# EAGLE board dynalo_v_dual (EAGLE 7.4.0)
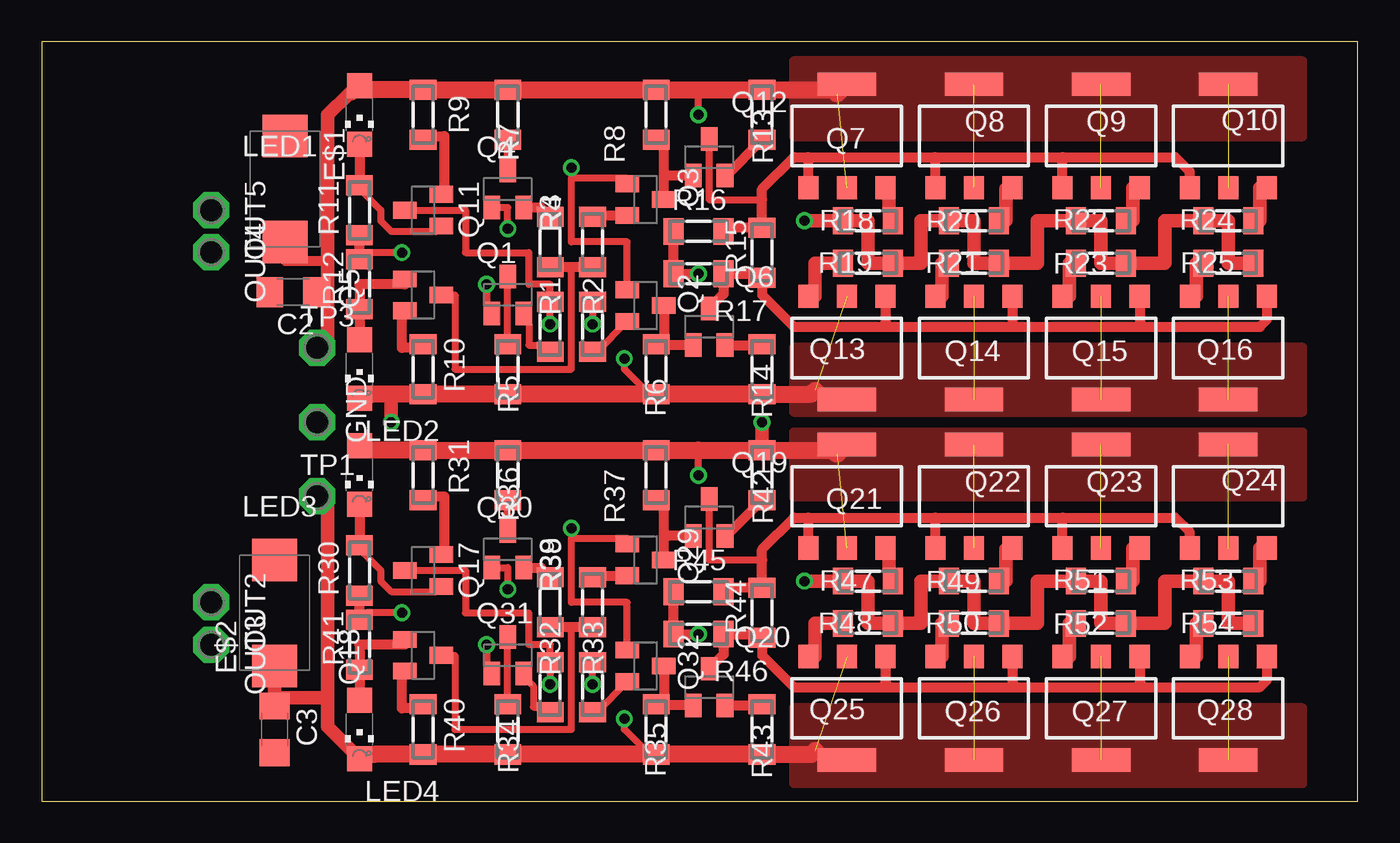
[diagram p0: board, top side]
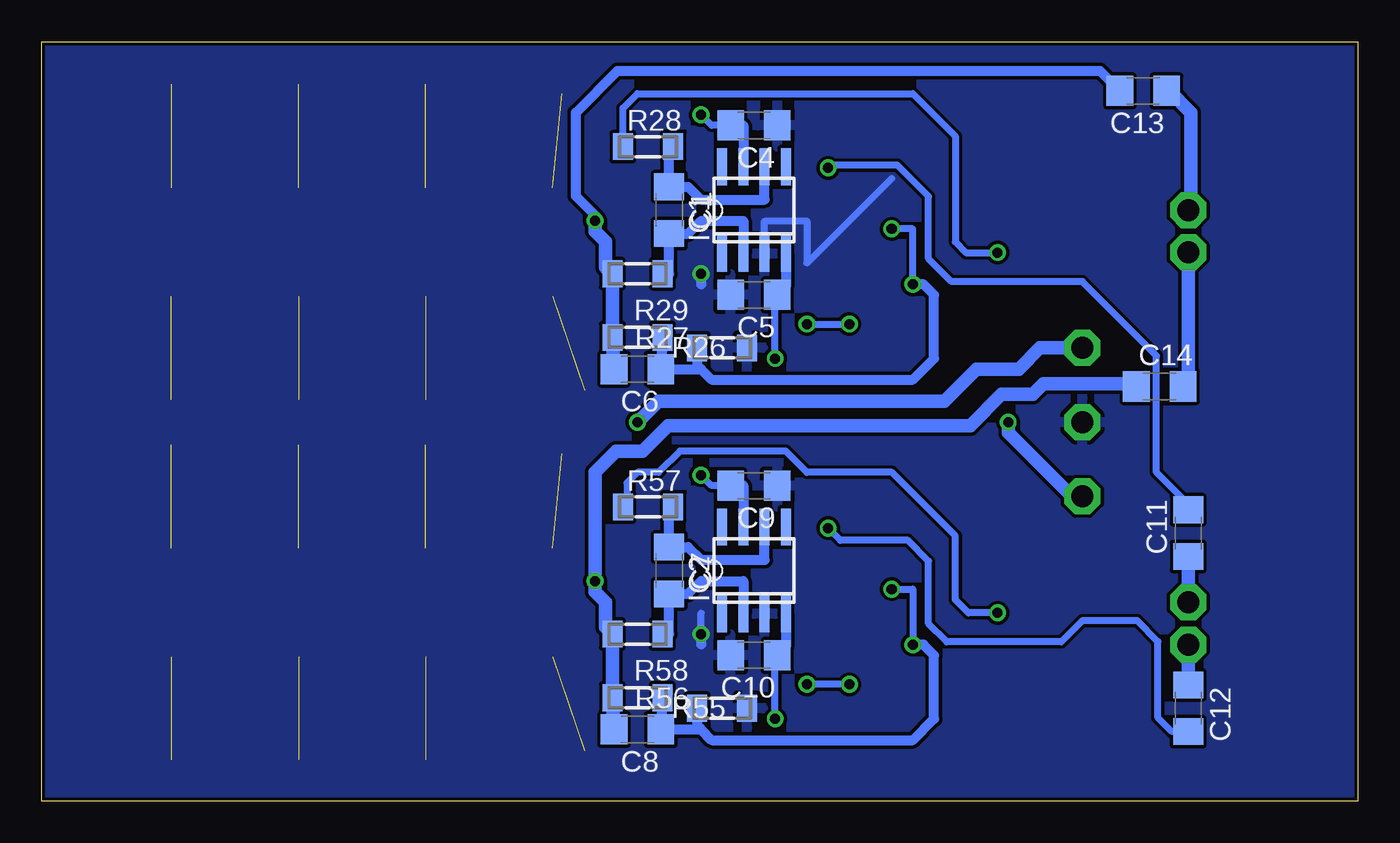
[diagram p1: board, bottom side, seen from below]

Size 78.89 x 45.5 mm. Coordinates in mm from the lower left corner, seen from the top.
Outline: 0,0 78.89,0 78.89,45.5 0,45.5 0,0
Copper layers (1*16): Top 0.035mm / dielectric 1.5mm / Bottom 0.035mm
Design rules "default *": minimum track width 10mil, minimum drill 0.3mm, track to track 8mil, track to pad 8mil, pad to pad 8mil, via to via 8mil, smd to smd 8mil, copper to edge 8mil, drill to drill 8mil, minimum pad ring 10mil, minimum via ring 8mil, stop-mask expansion 4mil, vias tented up to drill 0mil, thermal gap 10mil

## Footprints (pad centres in the part's own frame; a part is rotated, then mirrored left to right if it is on the bottom)
C1206 = smd 1.6 x 1.8: 1 -1.4,0; 2 1.4,0
D/7343-31R = smd 2.55 x 2.7: + 3.175,0; - -3.175,0
P1-13 = drill 1.321 pad 2.159 octagon: TP 0,0
SO08 = smd 0.6 x 2.2: 1 -1.905,-2.6; 2 -0.635,-2.6; 3 0.635,-2.6; 4 1.905,-2.6; 5 1.905,2.6; 6 0.635,2.6; 7 -0.635,2.6; 8 -1.905,2.6
CHIPLED_1206 = smd 1.5 x 1.5: A 0,-1.75; C 0,1.75
SOT23-BEC = smd 1 x 1.4: B -0.95,-1.1; C 0,1.1; E 0.95,-1.1
SOT223R_INFINEON = smd 1.2 x 1.4: 1 -2.311,-3.099; 2 0,-3.099; 3 2.311,-3.099 | smd 3.5 x 1.4: 4 0,3.099
MINI_MELF-0204W = smd 1.2 x 1.6: 1 -1.5,0; 2 1.5,0

## Placement (x,y rotation side)
C1  1uF  [C1206]  41.27,35.41 270 bottom
C2  [C1206]  15.07,30.5 180 top
C3  [C1206]  13.97,4.29 270 top
C4  [C1206]  36.2,40.48 180 bottom
C5  [C1206]  36.2,30.32 180 bottom
C6  [C1206]  43.18,25.88 180 bottom
C7  1uF  [C1206]  41.27,13.81 270 bottom
C8  [C1206]  43.18,4.29 180 bottom
C9  [C1206]  36.2,18.89 180 bottom
C10  [C1206]  36.2,8.73 180 bottom
C11  [C1206]  10.16,16.05 90 bottom
C12  [C1206]  10.16,5.56 270 bottom
C13  [C1206]  12.87,42.55 180 bottom
C14  [C1206]  11.88,24.84 0 bottom
E$1  [D/7343-31R]  14.6,36.67 270 top
E$2  [D/7343-31R]  13.97,11.28 90 top
GND  TPPAD1-13  [P1-13]  16.51,22.7 90 top
IC1  OP27D  [SO08]  36.2,35.41 0 bottom
IC2  OP27D  [SO08]  36.2,13.81 0 bottom
LED1  1.6V  [CHIPLED_1206]  19.05,41.12 180 top
LED2  1.6V  [CHIPLED_1206]  19.05,25.88 180 top
LED3  1.6V  [CHIPLED_1206]  19.05,19.53 180 top
LED4  1.6V  [CHIPLED_1206]  19.05,4.29 180 top
OUT2  TPPAD1-13  [P1-13]  10.16,11.91 270 top
OUT3  TPPAD1-13  [P1-13]  10.16,9.37 270 top
OUT4  TPPAD1-13  [P1-13]  10.16,32.88 270 top
OUT5  TPPAD1-13  [P1-13]  10.16,35.41 270 top
Q1  BC860SMD  [SOT23-BEC]  27.94,30.32 0 top
Q2  BC860SMD  [SOT23-BEC]  36.2,29.69 270 top
Q3  BC850SMD  [SOT23-BEC]  36.2,36.04 270 top
Q4  BC850SMD  [SOT23-BEC]  27.94,36.67 0 top
Q5  BC850SMD  [SOT23-BEC]  22.86,30.32 270 top
Q6  BC850SMD  [SOT23-BEC]  40.01,28.42 0 top
Q7  PZTA06  [SOT223R_INFINEON]  48.26,39.85 0 top
Q8  PZTA06  [SOT223R_INFINEON]  55.88,39.85 0 top
Q9  PZTA06  [SOT223R_INFINEON]  63.5,39.85 0 top
Q10  PZTA06  [SOT223R_INFINEON]  71.12,39.85 0 top
Q11  BC860SMD  [SOT23-BEC]  22.86,35.41 90 top
Q12  BC860SMD  [SOT23-BEC]  40.01,38.58 0 top
Q13  PZTA56  [SOT223R_INFINEON]  48.26,27.15 180 top
Q14  PZTA56  [SOT223R_INFINEON]  55.88,27.15 180 top
Q15  PZTA56  [SOT223R_INFINEON]  63.5,27.15 180 top
Q16  PZTA56  [SOT223R_INFINEON]  71.12,27.15 180 top
Q17  BC860SMD  [SOT23-BEC]  22.86,13.81 90 top
Q18  BC850SMD  [SOT23-BEC]  22.86,8.73 270 top
Q19  BC860SMD  [SOT23-BEC]  40.01,16.99 0 top
Q20  BC850SMD  [SOT23-BEC]  40.01,6.83 0 top
Q21  PZTA06  [SOT223R_INFINEON]  48.26,18.26 0 top
Q22  PZTA06  [SOT223R_INFINEON]  55.88,18.26 0 top
Q23  PZTA06  [SOT223R_INFINEON]  63.5,18.26 0 top
Q24  PZTA06  [SOT223R_INFINEON]  71.12,18.26 0 top
Q25  PZTA56  [SOT223R_INFINEON]  48.26,5.56 180 top
Q26  PZTA56  [SOT223R_INFINEON]  55.88,5.56 180 top
Q27  PZTA56  [SOT223R_INFINEON]  63.5,5.56 180 top
Q28  PZTA56  [SOT223R_INFINEON]  71.12,5.56 180 top
Q29  BC850SMD  [SOT23-BEC]  36.2,14.45 270 top
Q30  BC850SMD  [SOT23-BEC]  27.94,15.09 0 top
Q31  BC860SMD  [SOT23-BEC]  27.94,8.73 0 top
Q32  BC860SMD  [SOT23-BEC]  36.2,8.1 270 top
R1  680  [MINI_MELF-0204W]  30.48,28.42 90 top
R2  680  [MINI_MELF-0204W]  33.02,28.42 90 top
R3  680  [MINI_MELF-0204W]  30.48,33.5 90 top
R4  680  [MINI_MELF-0204W]  33.02,33.5 90 top
R5  2.74k  [MINI_MELF-0204W]  27.94,25.88 90 top
R6  2.74k  [MINI_MELF-0204W]  36.83,25.88 90 top
R7  2.74k  [MINI_MELF-0204W]  27.94,41.12 90 top
R8  2.74k  [MINI_MELF-0204W]  36.83,41.12 90 top
R9  500  [MINI_MELF-0204W]  22.86,41.12 90 top
R10  500  [MINI_MELF-0204W]  22.86,25.88 90 top
R11  10k  [MINI_MELF-0204W]  19.05,35.41 90 top
R12  10k  [MINI_MELF-0204W]  19.05,30.96 90 top
R13  402  [MINI_MELF-0204W]  43.18,41.12 90 top
R14  402  [MINI_MELF-0204W]  43.18,25.88 90 top
R15  240  [MINI_MELF-0204W]  43.18,32.87 90 top
R16  3k01  [MINI_MELF-0204W]  39.37,34.13 0 top
R17  3k01  [MINI_MELF-0204W]  39.37,31.59 180 top
R18  25  [MINI_MELF-0204W]  49.53,34.77 0 top
R19  25  [MINI_MELF-0204W]  49.53,32.23 0 top
R20  25  [MINI_MELF-0204W]  55.88,34.77 0 top
R21  25  [MINI_MELF-0204W]  55.88,32.23 0 top
R22  25  [MINI_MELF-0204W]  63.5,34.77 0 top
R23  25  [MINI_MELF-0204W]  63.5,32.23 0 top
R24  25  [MINI_MELF-0204W]  71.12,34.77 0 top
R25  25  [MINI_MELF-0204W]  71.12,32.23 0 top
R26  1k  [MINI_MELF-0204W]  38.1,27.15 180 bottom
R27  10k  [MINI_MELF-0204W]  43.18,27.79 180 bottom
R28  15k  [MINI_MELF-0204W]  42.55,39.22 0 bottom
R29  100k  [MINI_MELF-0204W]  43.18,31.59 180 bottom
R30  10k  [MINI_MELF-0204W]  19.05,13.81 90 top
R31  500  [MINI_MELF-0204W]  22.86,19.53 90 top
R32  680  [MINI_MELF-0204W]  30.48,6.83 90 top
R33  680  [MINI_MELF-0204W]  33.02,6.83 90 top
R34  2.74k  [MINI_MELF-0204W]  27.94,4.29 90 top
R35  2.74k  [MINI_MELF-0204W]  36.83,4.29 90 top
R36  2.74k  [MINI_MELF-0204W]  27.94,19.53 90 top
R37  2.74k  [MINI_MELF-0204W]  36.83,19.53 90 top
R38  680  [MINI_MELF-0204W]  30.48,11.91 90 top
R39  680  [MINI_MELF-0204W]  33.02,11.91 90 top
R40  500  [MINI_MELF-0204W]  22.86,4.29 90 top
R41  10k  [MINI_MELF-0204W]  19.05,9.37 90 top
R42  402  [MINI_MELF-0204W]  43.18,19.53 90 top
R43  402  [MINI_MELF-0204W]  43.18,4.29 90 top
R44  240  [MINI_MELF-0204W]  43.18,11.28 90 top
R45  3k01  [MINI_MELF-0204W]  39.37,12.54 0 top
R46  3k01  [MINI_MELF-0204W]  39.37,10.01 180 top
R47  25  [MINI_MELF-0204W]  49.53,13.18 0 top
R48  25  [MINI_MELF-0204W]  49.53,10.64 0 top
R49  25  [MINI_MELF-0204W]  55.88,13.18 0 top
R50  25  [MINI_MELF-0204W]  55.88,10.64 0 top
R51  25  [MINI_MELF-0204W]  63.5,13.18 0 top
R52  25  [MINI_MELF-0204W]  63.5,10.64 0 top
R53  25  [MINI_MELF-0204W]  71.12,13.18 0 top
R54  25  [MINI_MELF-0204W]  71.12,10.64 0 top
R55  1k  [MINI_MELF-0204W]  38.1,5.56 180 bottom
R56  10k  [MINI_MELF-0204W]  43.18,6.2 180 bottom
R57  15k  [MINI_MELF-0204W]  42.55,17.62 0 bottom
R58  100k  [MINI_MELF-0204W]  43.18,10.01 180 bottom
TP1  TPPAD1-13  [P1-13]  16.51,18.26 0 top
TP3  TPPAD1-13  [P1-13]  16.51,27.15 0 top

## Library data of the parts
C1-C14 E$1 E$2 R1-R58 = Vwvwbg
GND OUT2-OUT5 TP1 TP3 = testpad
IC1 IC2 = linear
LED1-LED4 = led
Q1 Q2 Q11-Q17 Q19 Q25-Q28 Q31 Q32 = tranzistory SMD PNP
Q3-Q10 Q18 Q20-Q24 Q29 Q30 = tranzistory SMD NPN

## Nets
+15V: C2.1 C4.2 C9.2 E$1.+ IC1.7 IC2.7 LED1.A LED3.A Q7.2 Q7.4 Q8.2 Q8.4 Q9.2 Q9.4 Q10.2 Q10.4 Q21.2 Q21.4 Q22.2 Q22.4 Q23.2 Q23.4 Q24.2 Q24.4 R7.2 R8.2 R9.2 R13.2 R31.2 R36.2 R37.2 R42.2 TP3.TP
-15V: C3.1 C5.1 C10.1 E$2.- IC1.4 IC2.4 LED2.C LED4.C Q13.2 Q13.4 Q14.2 Q14.4 Q15.2 Q15.4 Q16.2 Q16.4 Q25.2 Q25.4 Q26.2 Q26.4 Q27.2 Q27.4 Q28.2 Q28.4 R5.1 R6.1 R10.1 R14.1 R34.1 R35.1 R40.1 R43.1 TP1.TP
GND: C4.1 C5.2 C9.1 C10.2 GND.TP IC1.3 IC2.3 R16.1 R17.2 R26.1 R45.1 R46.2 R55.1
N$1: C6.2 C13.2 R18.1 R19.2 R20.1 R21.2 R22.1 R23.2 R24.1 R25.2 R27.2 R29.2
N$2: Q7.3 R18.2
N$3: Q8.3 R20.2
N$4: Q9.3 R22.2
N$5: Q10.3 R24.2
N$6: Q13.3 R19.1
N$7: Q14.3 R21.1
N$8: Q15.3 R23.1
N$9: Q16.3 R25.1
N$10: Q11.E R9.1
N$11: Q7.1 Q8.1 Q9.1 Q10.1 Q12.C R15.2 R16.2
N$12: LED1.C Q11.B R11.2
N$13: Q6.C Q13.1 Q14.1 Q15.1 Q16.1 R15.1 R17.1
N$14: Q12.E R13.1
N$15: Q6.E R14.2
N$16: Q5.E R10.2
N$17: LED2.A Q5.B R12.1
N$18: Q5.C R3.1 R4.1
N$19: Q4.C R7.1
N$20: Q4.E R3.2
N$21: Q3.E R4.2
N$22: Q3.C Q12.B R8.1
N$23: Q1.E R1.1
N$24: Q2.C Q6.B R6.2
N$25: Q2.E R2.1
N$26: Q1.C R5.2
N$27: Q11.C R1.2 R2.2
N$28: C6.1 Q1.B Q4.B R26.2 R27.1
N$29: C11.2 Q2.B Q3.B
N$30: C1.1 IC1.6 R28.2
N$31: C8.2 C14.1 R47.1 R48.2 R49.1 R50.2 R51.1 R52.2 R53.1 R54.2 R56.2 R58.2
N$32: C1.2 IC1.2 R29.1
N$33: Q21.3 R47.2
N$34: R11.1 R12.2 R28.1
N$35: Q22.3 R49.2
N$36: Q23.3 R51.2
N$37: Q24.3 R53.2
N$38: Q25.3 R48.1
N$39: Q26.3 R50.1
N$40: Q27.3 R52.1
N$41: Q28.3 R54.1
N$42: Q19.C Q21.1 Q22.1 Q23.1 Q24.1 R44.2 R45.2
N$43: Q20.C Q25.1 Q26.1 Q27.1 Q28.1 R44.1 R46.1
N$44: Q19.E R42.1
N$45: Q20.E R43.2
N$46: Q18.E R40.2
N$47: LED4.A Q18.B R41.1
N$48: Q18.C R38.1 R39.1
N$49: Q19.B Q29.C R37.1
N$50: Q20.B Q32.C R35.2
N$51: Q17.C R32.2 R33.2
N$52: Q17.E R31.1
N$53: LED3.C Q17.B R30.2
N$54: C12.2 Q29.B Q32.B
N$55: C7.1 IC2.6 R57.2
N$56: C7.2 IC2.2 R58.1
N$57: R30.1 R41.2 R57.1
N$58: C8.1 Q30.B Q31.B R55.2 R56.1
N$59: Q31.E R32.1
N$60: Q32.E R33.1
N$61: Q31.C R34.2
N$62: Q30.C R36.1
N$63: Q30.E R38.2
N$64: Q29.E R39.2
S$1: C13.1 OUT5.TP
S$3: C11.1 OUT2.TP
S$4: C12.1 OUT3.TP
S$5: C14.2 OUT4.TP

## Tracks (layer width: path | path; a pad name or v marks a point on that pad's centre or on a via)
+15V  (via drill 0.6)  (8 unrouted)
  Top 0.406: v39.37,41.12 39.37,42.62 | v39.37,19.53 39.37,21.03 | C2.1 17.14,30.5 17.14,31.12
  Top 0.61: 17.02,32.36 14.6,32.36 E$1.+
  Top 0.813: TP3.TP 17.14,27.79 17.14,31.12 17.14,32.23 | 17.14,32.23 17.14,41.12 18.41,42.39 18.57,42.39 LED1.A | v43.18,22.7 R42.2 | 17.02,32.36 17.14,32.23
  Top 1.016: Q7.4 47.7,42.39 47.62,42.39 47.4,42.62 R13.2 39.37,42.62 R8.2 R7.2 R9.2 19.3,42.62 LED1.A | Q21.4 47.7,20.8 47.62,20.8 47.4,21.03 R42.2 39.37,21.03 R37.2 R36.2 R31.2 19.3,21.03 LED3.A
  Bottom 0.406: 36.83,40.48 38.73,40.48 v39.37,41.12 | 36.83,18.89 38.73,18.89 v39.37,19.53
  Bottom 0.61: C4.2 36.83,40.48 IC1.7 | C9.2 36.83,18.89 IC2.7
  Bottom 0.813: TP3.TP 19.05,27.15 20.32,25.88 22.86,25.88 24.77,23.96 41.92,23.96 v43.18,22.7
  pour Top (no thermals): 45.09,44.33 45.09,39.85 75.56,39.85 75.56,44.33
  pour Top (no thermals): 45.09,22.07 45.09,18.26 75.56,18.26 75.56,22.07
-15V  (via drill 0.6)  (8 unrouted)
  Top 0.406: R6.1 36.42,24.38 34.92,25.88 v34.92,26.52 | R35.1 36.42,2.79 34.92,4.29 v34.92,4.92
  Top 0.813: TP1.TP 17.14,17.62 17.14,6.2 | 17.14,6.2 17.14,4.45 LED4.C | v20.95,22.7 20.95,24.38 | 13.97,6.2 E$2.- | C3.1 13.97,6.2 | 13.97,6.2 17.14,6.2
  Top 1.016: 46.35,24.61 46.12,24.38 R14.1 R6.1 R5.1 R10.1 20.95,24.38 19.93,24.38 LED2.C | 46.35,3.02 46.12,2.79 R43.1 R35.1 R34.1 R40.1 19.93,2.79 LED4.C
  Bottom 0.406: v34.92,26.52 34.92,30.2 C5.1 | v34.92,4.92 34.92,8.61 C10.1
  Bottom 0.61: IC1.4 34.29,30.83 C5.1 | IC2.4 34.29,9.24 C10.1
  Bottom 0.813: TP1.TP 17.14,18.26 20.95,22.07 v20.95,22.7
  pour Top (no thermals): 45.09,23.34 75.56,23.34 75.56,27.15 45.09,27.15
  pour Top (no thermals): 45.09,1.08 75.56,1.08 75.56,5.56 45.09,5.56
GND  (via drill 0.6)
  Top 0.61: R16.1 R17.2 v39.37,31.59 | R45.1 R46.2 v39.37,10.01
  Bottom 0.406: v39.37,10.01 39.37,11.28 | IC1.3 35.56,34.77 33.02,34.77 33.02,32.23 27.94,37.31
  Bottom 0.61: v39.37,31.59 39.37,30.96 | v39.37,10.01 39.37,9.37
  pour Bottom: -7.62,46.2 81.28,46.2 81.28,-2.06 -7.62,-2.06
N$1  (via drill 0.6)
  Top 0.813: R25.2 71.12,32.23 71.12,34.77 R24.1 67.31,34.77 67.31,32.23 R23.2 63.5,32.23 63.5,34.77 R22.1 59.69,34.77 59.69,32.23 R21.2 55.88,32.23 55.88,34.77 R20.1 52.7,34.77 52.7,32.23 R19.2 49.53,32.23 49.53,34.77 R18.1 v45.72,34.77
  Bottom 0.61: C6.2 44.68,27.15 | 14.27,42.85 C13.2 15.46,43.75 44.38,43.75 46.88,41.25 46.88,36.25 45.72,35.09 v45.72,34.77
  Bottom 0.813: v45.72,34.77 45.72,34.13 45.09,33.5 45.09,32 R29.2 R27.2 44.68,27.25 C6.2
N$2
  Top 0.61: Q7.3 50.8,36.75
  Top 0.813: 50.8,36.75 50.8,35.41 R18.2
N$3
  Top 0.813: Q8.3 58.19,36.67 57.78,36.67 57.78,34.77 R20.2
N$4
  Top 0.813: R22.2 65.41,34.77 65.41,36.75 Q9.3
N$5
  Top 0.813: R24.2 73.03,34.77 73.03,36.75 Q10.3
N$6
  Top 0.813: Q13.3 46.35,30.25 46.35,32.23 R19.1
N$7
  Top 0.813: R21.1 53.98,32.23 53.98,30.25 Q14.3
N$8
  Top 0.813: R23.1 61.59,32.23 61.59,30.25 Q15.3
N$9
  Top 0.813: R25.1 69.22,32.23 69.22,30.25 Q16.3
N$10
  Top 0.61: R9.1 22.86,39.85 24.13,39.85 24.13,36.35 Q11.E
N$11
  Top 0.406: Q12.C 40.01,36.04 43.18,36.04
  Top 0.61: 45.95,38.58 45.09,38.58 43.18,36.67 43.18,36.04 R15.2 41.1,34.37 R16.2 | 45.95,38.58 53.57,38.58 | 53.57,38.58 61.19,38.58 | 61.19,38.58 67.94,38.58 68.81,37.72 Q10.1 | Q7.1 45.95,38.58 | Q8.1 53.57,38.58 | Q9.1 61.19,38.58
N$12
  Top 0.406: R11.2 19.05,36.67 20.32,35.41 20.32,34.77 20.95,34.13 23.64,34.13 Q11.B
  Top 0.61: LED1.C R11.2
N$13
  Top 0.61: 50.8,28.42 45.09,28.42 43.18,30.32 R15.1 42.95,31.59 R17.1 40.87,30.39 Q6.C | 50.8,28.42 58.42,28.42 | 58.42,28.42 66.04,28.42 | 66.04,28.42 73.03,28.42 73.43,28.83 Q16.1 | Q15.1 65.81,28.65 66.04,28.42 | Q14.1 58.19,28.65 58.42,28.42 | Q13.1 50.57,28.65 50.8,28.42
N$14
  Top 0.61: Q12.E 41.04,37.48 R13.1
N$15
  Top 0.61: Q6.E 43.12,27.32 R14.2
N$16
  Top 0.61: R10.2 22.86,27.15 21.59,27.15 21.59,29.38 Q5.E
N$17
  Top 0.61: Q5.B 21.76,30.96 19.05,30.96 R12.1 LED2.A
N$18
  Top 0.406: Q5.C 24.77,30.32 24.77,25.88 31.75,25.88 31.75,32
  Top 0.61: R4.1 31.75,32 R3.1
N$19
  Top 0.406: Q4.C R7.1
N$20
  Top 0.61: Q4.E 29.91,35.58 R3.2
N$21
  Top 0.61: R4.2 33.02,35.09 Q3.E
N$22
  Top 0.61: Q3.C 37.3,37.31 | 37.3,37.31 37.3,39.16 R8.1 | Q12.B 37.47,37.48 37.3,37.31
N$23
  Top 0.406: Q1.E 28.89,28.91 29.21,28.59 29.21,27.32 30.09,27.32 R1.1
N$24
  Top 0.61: Q6.B 37.47,27.32 | 37.47,27.32 36.89,27.32 R6.2 | Q2.C 37.3,27.49 37.47,27.32
N$25
  Top 0.406: R2.1 33.27,26.92 Q2.E
  Top 0.61: 34.92,28.74 Q2.E
N$26
  Top 0.406: R5.2 Q1.C
N$27  (via drill 0.6)
  Top 0.406: 21.59,35.41 Q11.C 25.4,35.41 25.4,32.87 29.21,32.87 29.21,30.96 30.48,30.96 R1.2 v30.48,28.59 | R2.2 v33.02,28.59
  Bottom 0.406: v33.02,28.59 v30.48,28.59
N$28  (via drill 0.6)
  Top 0.406: 26.67,35.58 Q4.B 27.94,35.58 v27.94,34.29 | v26.67,30.96 26.67,29.05 26.99,29.05 Q1.B
  Bottom 0.406: v26.67,30.96 26.67,34.29 v27.94,34.29
  Bottom 0.61: R27.1 41.68,27.15 C6.1 39.37,25.88 | R26.2 39.6,26.11 39.37,25.88 | 39.37,25.88 38.73,25.25 26.67,25.25 25.4,26.52 25.4,30.32 26.04,30.96 v26.67,30.96
N$29  (via drill 0.6)
  Top 0.406: Q2.B 35.09,33.5 31.75,33.5 31.75,37.31 | Q3.B 35.09,37.31 31.75,37.31 | v31.75,37.95 31.75,37.31
  Bottom 0.406: v31.75,37.95 31.59,38.11 27.6,38.11 25.73,36.23 25.73,32.5 24.35,31.12 16.51,31.12 12.06,26.68 12.06,19.7 10.16,17.79 C11.2
N$30
  Bottom 0.61: IC1.6 35.56,36.04 39.37,36.04 40.13,36.8 C1.1 41.27,38.98 R28.2
N$31  (via drill 0.6)
  Top 0.813: R54.2 71.12,10.64 71.12,13.18 R53.1 67.31,13.18 67.31,10.64 R52.2 63.5,10.64 63.5,13.18 R51.1 59.69,13.18 59.69,10.64 R50.2 55.88,10.64 55.88,13.18 R49.1 52.7,13.18 52.7,10.64 R48.2 49.53,10.64 49.53,13.18 R47.1 v45.72,13.18
  Bottom 0.61: C8.2 44.68,5.56
  Bottom 0.813: C8.2 44.68,5.66 R56.2 R58.2 45.09,10.41 45.09,11.91 45.72,12.54 v45.72,13.18 45.72,19.7 44.45,20.96 42.88,20.96 41.35,22.5 23.23,22.5 21.35,24.38 19.48,24.38 18.85,25 13.97,25 | 13.85,25 13.97,25 | C14.1 13.81,24.84 13.97,25
N$32
  Bottom 0.61: R29.1 41.27,31.59 C1.2 40.13,34.01 39.37,34.77 36.83,34.77 IC1.2
N$33
  Top 0.61: Q21.3 50.8,15.16
  Top 0.813: 50.8,15.16 50.8,13.81 R47.2
N$34  (via drill 0.6)
  Top 0.406: v21.59,32.87 19.45,32.87 R12.2
  Top 0.61: R12.2 R11.1
  Bottom 0.406: R28.1 44.05,41.52 43.18,42.39 26.67,42.39 24.13,39.85 24.13,33.5 23.5,32.87 v21.59,32.87
N$35
  Top 0.813: Q22.3 58.19,15.09 57.78,15.09 57.78,13.18 R49.2
N$36
  Top 0.813: R51.2 65.41,13.18 65.41,15.16 Q23.3
N$37
  Top 0.813: R53.2 73.03,13.18 73.03,15.16 Q24.3
N$38
  Top 0.813: Q25.3 46.35,8.66 46.35,10.64 R48.1
N$39
  Top 0.813: R50.1 53.98,10.64 53.98,8.66 Q26.3
N$40
  Top 0.813: R52.1 61.59,10.64 61.59,8.66 Q27.3
N$41
  Top 0.813: R54.1 69.22,10.64 69.22,8.66 Q28.3
N$42
  Top 0.406: Q19.C 40.01,14.45 43.18,14.45
  Top 0.61: 45.95,16.99 45.09,16.99 43.18,15.09 43.18,14.45 R44.2 41.1,12.78 R45.2 | 45.95,16.99 53.57,16.99 | 53.57,16.99 61.19,16.99 | 61.19,16.99 67.94,16.99 68.81,16.13 Q24.1 | Q21.1 45.95,16.99 | Q22.1 53.57,16.99 | Q23.1 61.19,16.99
N$43
  Top 0.61: 50.8,6.83 45.09,6.83 43.18,8.73 R44.1 42.95,10.01 R46.1 40.87,8.79 Q20.C | 50.8,6.83 58.42,6.83 | 58.42,6.83 66.04,6.83 | 66.04,6.83 73.03,6.83 73.43,7.24 Q28.1 | Q27.1 65.81,7.06 66.04,6.83 | Q26.1 58.19,7.06 58.42,6.83 | Q25.1 50.57,7.06 50.8,6.83
N$44
  Top 0.61: Q19.E 41.04,15.89 R42.1
N$45
  Top 0.61: Q20.E 43.12,5.73 R43.2
N$46
  Top 0.61: R40.2 22.86,5.56 21.59,5.56 21.59,7.79 Q18.E
N$47
  Top 0.61: Q18.B 21.76,9.37 19.05,9.37 R41.1 LED4.A
N$48
  Top 0.406: Q18.C 24.77,8.73 24.77,4.29 31.75,4.29 31.75,10.41
  Top 0.61: R39.1 31.75,10.41 R38.1
N$49
  Top 0.61: Q29.C 37.3,15.72 | 37.3,15.72 37.3,17.57 R37.1 | Q19.B 37.47,15.89 37.3,15.72
N$50
  Top 0.61: Q20.B 37.47,5.73 | 37.47,5.73 36.89,5.73 R35.2 | Q32.C 37.3,5.9 37.47,5.73
N$51  (via drill 0.6)
  Top 0.406: 21.59,13.81 Q17.C 25.4,13.81 25.4,11.28 29.21,11.28 29.21,9.37 30.48,9.37 R32.2 v30.48,7 | v33.02,7 R33.2
  Bottom 0.406: v30.48,7 v33.02,7
N$52
  Top 0.61: R31.1 22.86,18.26 24.13,18.26 24.13,14.77 Q17.E
N$53
  Top 0.406: R30.2 19.05,15.09 20.32,13.81 20.32,13.18 20.95,12.54 23.64,12.54 Q17.B
  Top 0.61: LED3.C R30.2
N$54  (via drill 0.6)
  Top 0.406: Q32.B 35.09,11.91 31.75,11.91 31.75,15.72 | Q29.B 35.09,15.72 31.75,15.72 | v31.75,16.36 31.75,15.72
  Bottom 0.406: v31.75,16.36 31.02,15.62 26.98,15.62 25.73,14.38 25.73,10.62 24.64,9.54 17.78,9.54 16.51,10.8 13.22,10.8 11.97,9.55 11.97,5 11.13,4.16 C12.2
N$55
  Bottom 0.61: IC2.6 35.56,14.45 39.37,14.45 40.13,15.21 C7.1 41.27,17.39 R57.2
N$56
  Bottom 0.61: R58.1 41.27,10.01 C7.2 40.13,12.41 39.37,13.18 36.83,13.18 IC2.2
N$57  (via drill 0.6)
  Top 0.406: v21.59,11.28 19.45,11.28 R41.2
  Top 0.61: R41.2 R30.1
  Bottom 0.406: v21.59,11.28 23.33,11.28 24.13,12.07 24.13,15.88 27.94,19.7 33.02,19.7 34.29,20.96 40.64,20.96 41.91,19.7 43.18,19.7 43.81,19.06 43.81,17.86 R57.1
N$58  (via drill 0.6)
  Top 0.406: 26.67,13.98 Q30.B 27.94,13.98 v27.94,12.7 | v26.67,9.37 26.67,7.46 26.99,7.46 Q31.B
  Bottom 0.406: v27.94,12.7 26.67,12.7 v26.67,9.37
  Bottom 0.61: R56.1 41.68,5.56 C8.1 39.37,4.29 | R55.2 39.6,4.52 39.37,4.29 | 39.37,4.29 38.73,3.65 26.67,3.65 25.4,4.92 25.4,8.73 26.04,9.37 v26.67,9.37
N$59
  Top 0.406: Q31.E 28.89,7.46 29.48,6.88 29.48,5.62 30.18,5.62 R32.1
N$60
  Top 0.406: R33.1 33.27,5.33 Q32.E
  Top 0.61: 34.92,7.15 Q32.E
N$61
  Top 0.406: R34.2 Q31.C
N$62
  Top 0.406: Q30.C R36.1
N$63
  Top 0.61: Q30.E 29.91,13.98 R38.2
N$64
  Top 0.61: R39.2 33.02,13.5 Q29.E
S$1
  Bottom 0.813: C13.1 11.3,42.55 10,41.25 10,35.58 OUT5.TP
S$3
  Bottom 0.813: OUT2.TP C11.1
S$4
  Bottom 0.813: C12.1 OUT3.TP
S$5
  Bottom 0.813: OUT4.TP 10.16,25.16 C14.2